# Altium PCB PCB.PcbDoc (part 2 of 3)
Units mil, origin at the board's own origin, x right, y up, seen from the top; angles counter-clockwise.
Board outline 3915 x 3280 mil, 4 copper layers (Top Layer, Top GND, Bottom GND, Bottom Layer), stack 61.581 mil thick; 92 components, 110 nets, 515 pads, 133 vias.
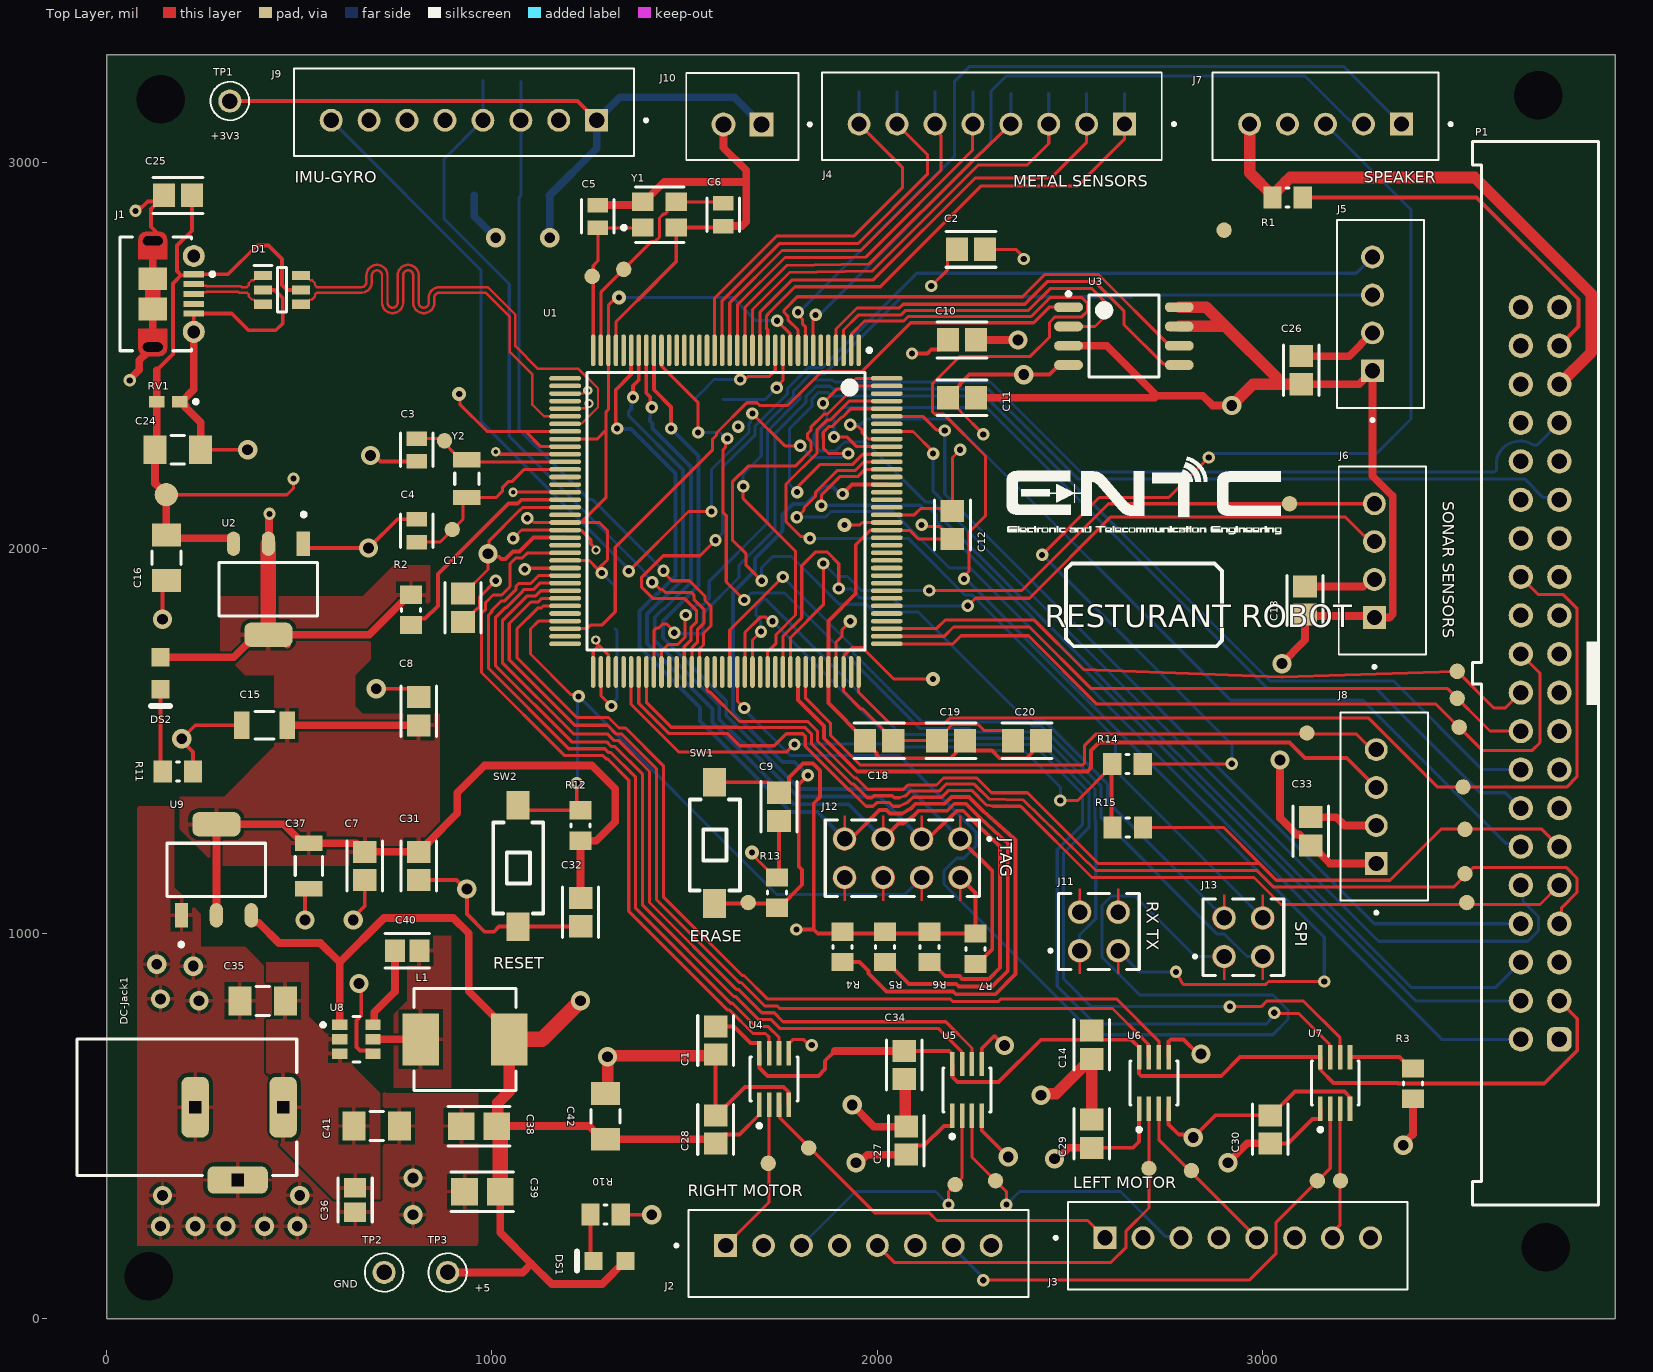
[diagram p0: Top Layer view]

## Part data (continued)
P1: library part CMP-1502-00074-2, Color=Black, Contact Resistance=20mΩ, Current Rating=3A, Insulation Resistance=1GΩ, Max Operating Temperature=105°C, Min Operating Temperature=-40°C, Operating Supply Voltage=250V, Connector Type="Male Pin", Contact Material=Copper, Contact Mating Length=5.6896mm, Contact Plating=Gold, Fastening Type=Latch, Gender=Male, Insulation Material=PBT, Lead Pitch=2.54mm, Length=70.3mm, Mount="Through Hole", NexarPartId=32855492, Number of Contacts=40, Number of Pins=40, Number of Positions=40, Number of Rows=2, Orientation=Vertical, Pitch=2.54mm, REACH SVHC=Unknown, RoHS=Compliant, Row Spacing=2.54mm, Termination=Solder
R1 R2 R3 R4 R5 R6 R7 R8 R9 R10 R11 R12 R13 R14 R15: library part CMP-2000-05025-1, "Chip Resistor, 10 KOhm, +/- 5%, 0.125 W, -55 to 155 degC, 0805 (2012 Metric), RoHS, Tape and Reel", Manufacturer=Yageo, Package Description="2-Pin Surface Mounted Device, Body 2 x 1.25 mm", Package Reference=805, Power Rating=250mW, Resistance=10k, Resistance Tolerance=±5%, Resistor Case Style=0805[2012Metric], Resistor Element Type=ThickFilm, Temperature Coefficient=±100ppm/degC, Voltage Rating=150V, Automotive Qualification Standard=-, Datasheet URL=http://www.yageo.ru/pdf/RC0805.pdf, Datasheet Version="REV. 2, 09/2004", Manufacturer URL=http://www.yageo.com/, MSL=MSL1-Unlimited, Packaging=CutTape, Product Range=RCSeries, SVHC=ToBeAdvised
RV1: library part CMP-0584-00001-2, "ESD Protector, 5 V Supply, -40 to 85 degC, 1.6 x 0.8 x 0.55 mm SMD, RoHS, Tape and Reel", Manufacturer=Bourns, Operating Temperature="-40 to 85 degC", CO="0.5 pF", ComponentLink1Description="Manufacturer URL", ComponentLink1URL=http://www.bourns.com/, ComponentLink2Description=Datasheet, ComponentLink2URL=http://www.bourns.com/data/global/pdfs/MLC.pdf, DatasheetVersion="Rev. S", Mounting Technology="Surface Mount", PackageDescription="2-Pin SMD, Body 1.6 x 0.8 mm, Pitch 1.52 mm", PackageReference=CG0603-2, Packing="Tape and Reel", PartNumber=CG0603MLC-05E, RoHS=TRUE, RT="1 ns", VC="20 V", VDC="5 V", VT="150 V"
SW1 SW2: library part SW, "SWITCH TACTILE SPST-NO 0.05A 12V"
TP1 TP2 TP3: "Test Point Miniature THM H .300 Nylon 46 Insulated Red PhosBronze/Silver", Package="Test Point Keystone Electronics", Check_prices=https://www.snapeda.com/parts/5000/Keystone/view-part/?ref=eda, MF="Keystone Electronics", MP=5000, SnapEDA_Link=https://www.snapeda.com/parts/5000/Keystone/view-part/?ref=snap
U1: library part CMP-0076-00188-1, "SAM3X ARM Cortex-M3 Flash-based Microcontroller, 512 KB Flash, 96 KB SRAM, 103 User I/Os, 1.62 to 3.6 V, -40 to 85 degC, 144-Pin LQFP, RoHS", Manufacturer=Atmel, Max. Operating Freq.="84 MHz", Operating Voltage="1.62 to 3.6 V", Temp. Range="-40 to 85 degC", # of Touch Channels=32, ADC Channels=16, ADC Resolution="12 bits", CAN=2, ComponentLink1Description="Manufacturer URL", ComponentLink1URL=http://www.atmel.com/, ComponentLink2Description=Datasheet, ComponentLink2URL=http://www.atmel.com/Images/doc11057.pdf, ComponentLink3Description="Package Specification", ComponentLink3URL=http://www.atmel.com/Images/doc11057.pdf, DAC Channels=2, DatasheetVersion=11057B, Flash="512 Kbytes", Max I/O Pins=103, Mounting Technology="Surface Mount", PackageDescription="100-Pin Quad Flat Package, Body 20 x 20 mm, Pitch 0.5 mm", PackageReference=LQFP-144, PackageVersion=11057B, PartNumber=ATSAM3X8EA-AU, RoHS=TRUE, SPI=4, SRAM="96 Kbytes", UART=5
U2 U9: library part CMP-12153-000006-1, "IC REG LINEAR 3.3V 1.2A SOT223", Dropout Voltage=350mV, Manufacturer=STMicroelectronics, Max Junction Temp=+125°C, Max Supply Voltage=18V, Min Supply Voltage=2.6V, Nominal Supply Current=250uA, Output Current=2A, Output Voltage=3.3V, Package=SOT223-0046067, Temperature="-40°C to +125°C", Temperature Range Low=-40°C, Accuracy Percentage=2%, Automotive=No, Category=IC, ComponentLink2Description=Datasheet, ComponentLink2URL=https://www.st.com/resource/en/datasheet/ldl1117.pdf, Device Class L1="Integrated Circuits (ICs)", Device Class L2="Power Management ICs", Device Class L3="Voltage Regulators - Linear", Digikey Description="IC REG LINEAR 3.3V 1.2A SOT223", Height=1.9mm, Ipc Land Pattern Name=SOT230P700X190-4, Lead Free=Yes, Manufacturer Part Number=LDL1117S33R, Mouser Description="LDL1117 Series 1.2 A 3.3 V High PSRR LDO Linear Voltage Regulator-SOT-223", Number Of Outputs=1, Octopart=https://octopart.com/ldl1117s33r-stmicroelectronics-81876163, Output Type=Fixed, RoHS=TRUE, Standoff Height=0.02mm, Temperature Range High=+125°C
U3: library part CMP-2000-05005-1, "3V 128M-Bit Serial Flash Memory with Dual/Quad SPI & QPI, 2.7 to 3.6 V, -40 to 85 degC, 8-Pin SOIC, RoHS, Tape and Reel", Manufacturer=Winbond, Operating Supply Voltage (Max)=3.6V, Operating Supply Voltage (Min)=2.7V, Operating Supply Voltage (Typ)=3/3.3V, Operating Temp Range=-40Cto85C, Operating Temperature (Max)=85C, Operating Temperature (Min)=-40C, Operating Temperature Classification=Industrial, Package Description="8-Pin Small Outline Integrated Circuit, Body 5.28 x 5.28 mm, Pitch 1.27 mm", Package Reference=SS-8, Package Type=SOICW, Program/Erase Volt (Typ)=2.7to3.6V, Supply Current=20mA, Access Time (Max)=7ns, Address Bus=24b, Boot Type=NotRequired, Cell Type=NOR, Datasheet URL=http://download.siliconexpert.com/pdfs/2015/11/30/6/42/17/890/win_/manual/3w25q128fv20rev.l2008242015.pdf, Datasheet Version="Rev. L, 08/2015", Density=134217728Bit, Interface Type=Serial(SPI), Manufacturer URL=http://www.winbond.com/hq/index.html?__locale=en, Mounting=SurfaceMount, Number of Words=16777216, Pin Count=8, Programmable=Yes, Rad Hardened=No, Sync/Async=Synchronous, Word Size=8b
U4 U5 U6 U7: library part CMP-0859-00006-5, "IC TRNSLTR BIDIRECTIONAL SM8", Ambient Temperature Range High=+85°C, Ambient Temperature Range Low=-40°C, Manufacturer="Texas Instruments", Max Junction Temp=+150°C, Max Supply Voltage=5.5V, Min Supply Voltage=1.65V, Nominal Supply Current=2-50uA, Package=DCT0008A, Temperature="-40°C to +85°C", Automotive=No, Category=IC, ComponentLink2Description=Datasheet, ComponentLink2URL=http://www.ti.com/lit/ds/symlink/sn74lvc2t45.pdf, Data Rate=420Mbits/s, Device Class L1="Integrated Circuits (ICs)", Device Class L2="Logic ICs", Device Class L3="Voltage Level Shifters", Digikey Description="IC TRNSLTR BIDIRECTIONAL SM8", Height=1.3mm, Ipc Land Pattern Name=SOP65P400X130-8, Lead Free=Yes, Logic Function Desc=Non-Inverting, Manufacturer Part Number=SN74LVC2T45DCTR, Mouser Description="Translation - Voltage Levels DUAL-BIT DUAL SUPPLY TRANSCEIVER", Number Of Circuits=1, Number Of Inputs=1, Number Of Outputs=1, Octopart=https://octopart.com/sn74lvc2t45dctr-texas+instruments-517051, RoHS=TRUE, Standoff Height=0mm, Temperature Range High=+85°C, Temperature Range Low=-40°C, V A Max=5.5V, V A Min=1.65V, V B Max=5.5V, V B Min=1.65V
U8: library part CMP-12757-000001-1, "IC REG BUCK 5V 2A TSOT26", Ambient Temperature Range High=+85°C, Ambient Temperature Range Low=-40°C, Manufacturer="Diodes Inc.", Max Junction Temp=+160°C, Max Supply Voltage=32V, Min Supply Voltage=3.8V, Nominal Supply Current=22uA, Output Current=2A, Output Voltage=5V, Package=TSOT26, Switching Frequency=1100kHz, Temperature="-40°C to +85°C", Automotive=No, Category=IC, ComponentLink2Description=Datasheet, ComponentLink2URL=https://www.diodes.com/assets/Datasheets/AP63200-AP63201-AP63203-AP63205.pdf, Device Class L1="Integrated Circuits (ICs)", Device Class L2="Power Management ICs", Device Class L3="Voltage Regulators - Switching", Digikey Description="IC REG BUCK 5V 2A TSOT26", Footprint Url=https://www.diodes.com/assets/Package-Files/TSOT26.pdf, Height=1mm, Lead Free=Yes, Manufacturer Part Number=AP63205WU-7, Max Duty Cycle=100%, Number Of Outputs=1, Octopart=https://octopart.com/ap63205wu-7-diodes+inc.-98099551, Output Type=Fixed, RoHS=TRUE, Standoff Height=0.01mm, Switching Topology=Buck, Temperature Range High=+85°C, Temperature Range Low=-40°C
Y1: library part CMP-2000-05039-3, "Crystal 12MHz ±20ppm (Tol) ±30ppm (Stability) 18pF FUND 120Ω 4-Pin SMD T/R", Case/Package=CSMD, ESR (Equivalent Series Resistance)=120R, Frequency=12MHz, Frequency Stability=30ppm, Frequency Tolerance=20ppm, Load Capacitance=18pF, Max Operating Temperature=85°C, Min Operating Temperature=-40°C, Operating Frequency="12 MHz", Package Quantity=1000, Depth=2.5mm, Height=1mm, Lead Free="Lead Free", Length=3.2mm, Mount="Surface Mount", Number of Pins=4, Packaging="Tape and Reel", Radiation Hardening=No, Series=ABM8G, Series Resistance=120R, Termination=SMD/SMT, Tolerance=20ppm, Width=2.5mm
Y2: library part CMP-00536-22488149-1, "NX3215SA-32.768K-STD-MUA-14 Parallel - Fundamental Quartz Crystal, 0.032768MHz Nom", Case/Package=SMD/SMT, ESR (Equivalent Series Resistance)=70kΩ, Frequency=32.768kHz, Frequency Tolerance=0.002%, Load Capacitance=6pF, Max Operating Temperature=85°C, Min Operating Temperature=-40°C, Height=889µm, Length=3.2004mm, Mount="Surface Mount", NexarPartId=22488149, Number of Pins=2, Packaging="Tape & Reel (TR)", RoHS=Compliant, Width=1.4986mm

## Free pads (board coordinates)
  round 60 smd: 1(155,2138.36)
  round 40 smd: 1(877.01,2278.15) 1(897.01,2048.15) 1(1260,2705) 1(1342.01,2723.15) 1(1665,1080) 1(1717.01,403.15) 1(1822.01,443.15) 1(2202.01,348.15) 1(2307.01,358.15) 1(2705,390) 1(2815.16,384.37) 1(2900,2825) 1(3070,2115) 1(3115,1520) 1(3142.01,358.15) 1(3202.01,358.15) 1(3505,1610) 1(3505,1680) 1(3510,1535) 1(3520,1380) 1(3525,1155) 1(3525,1270) 1(3530,1080)
  round 40 smd far side: 1(975,3210) 1(1075,3205) 1(1220,1485) 1(1855,1300) 1(1950,3185) 1(1955,1305) 1(2049,1311) 1(2050,3185) 1(2150,3185) 1(2155,1305) 1(2250,3185) 1(2265,1675) 1(2345,3180) 1(2443.7,3178.7) 1(2545,3180) 1(2565,1160) 1(2640,3180) 1(2708.39,903.56) 1(3050,2715) 1(3145,3190) 1(3270,3195) 1(3440,980) 1(3455,825) 1(3490,1510) 1(3491.23,1378.6) 1(3491.23,1445.1) 1(3510,1025) 1(3525,725) 1(3525,865)
  round 0 hole 125.98 paste-99999 mask+0: M15(3735,185) M16(140,3165) M17(110,110) M18(3715,3175)

## Via types
v1: diameter 32, hole 16, Top Layer to Bottom Layer, 77 vias
v2: diameter 50, hole 28, Top Layer to Bottom Layer, 44 vias
v3: diameter 36, hole 16, Top Layer to Bottom Layer, 6 vias
v4: diameter 24, hole 12, Top Layer to Bottom Layer, 6 vias

## Text inside footprints (layer, text, board x,y; h text height)
J1: Mechanical 1 "PCB EDGE" at 58.98,2942.83 h19.68 r270